# Altium PCB PCB1.PcbDoc
Units mm, origin at the board's own origin, x right, y up, seen from the top; angles counter-clockwise.
Board outline 42.04 x 44.96 mm, 2 copper layers (Top Layer, Bottom Layer); 11 components, 36 nets, 93 pads, 0 vias.
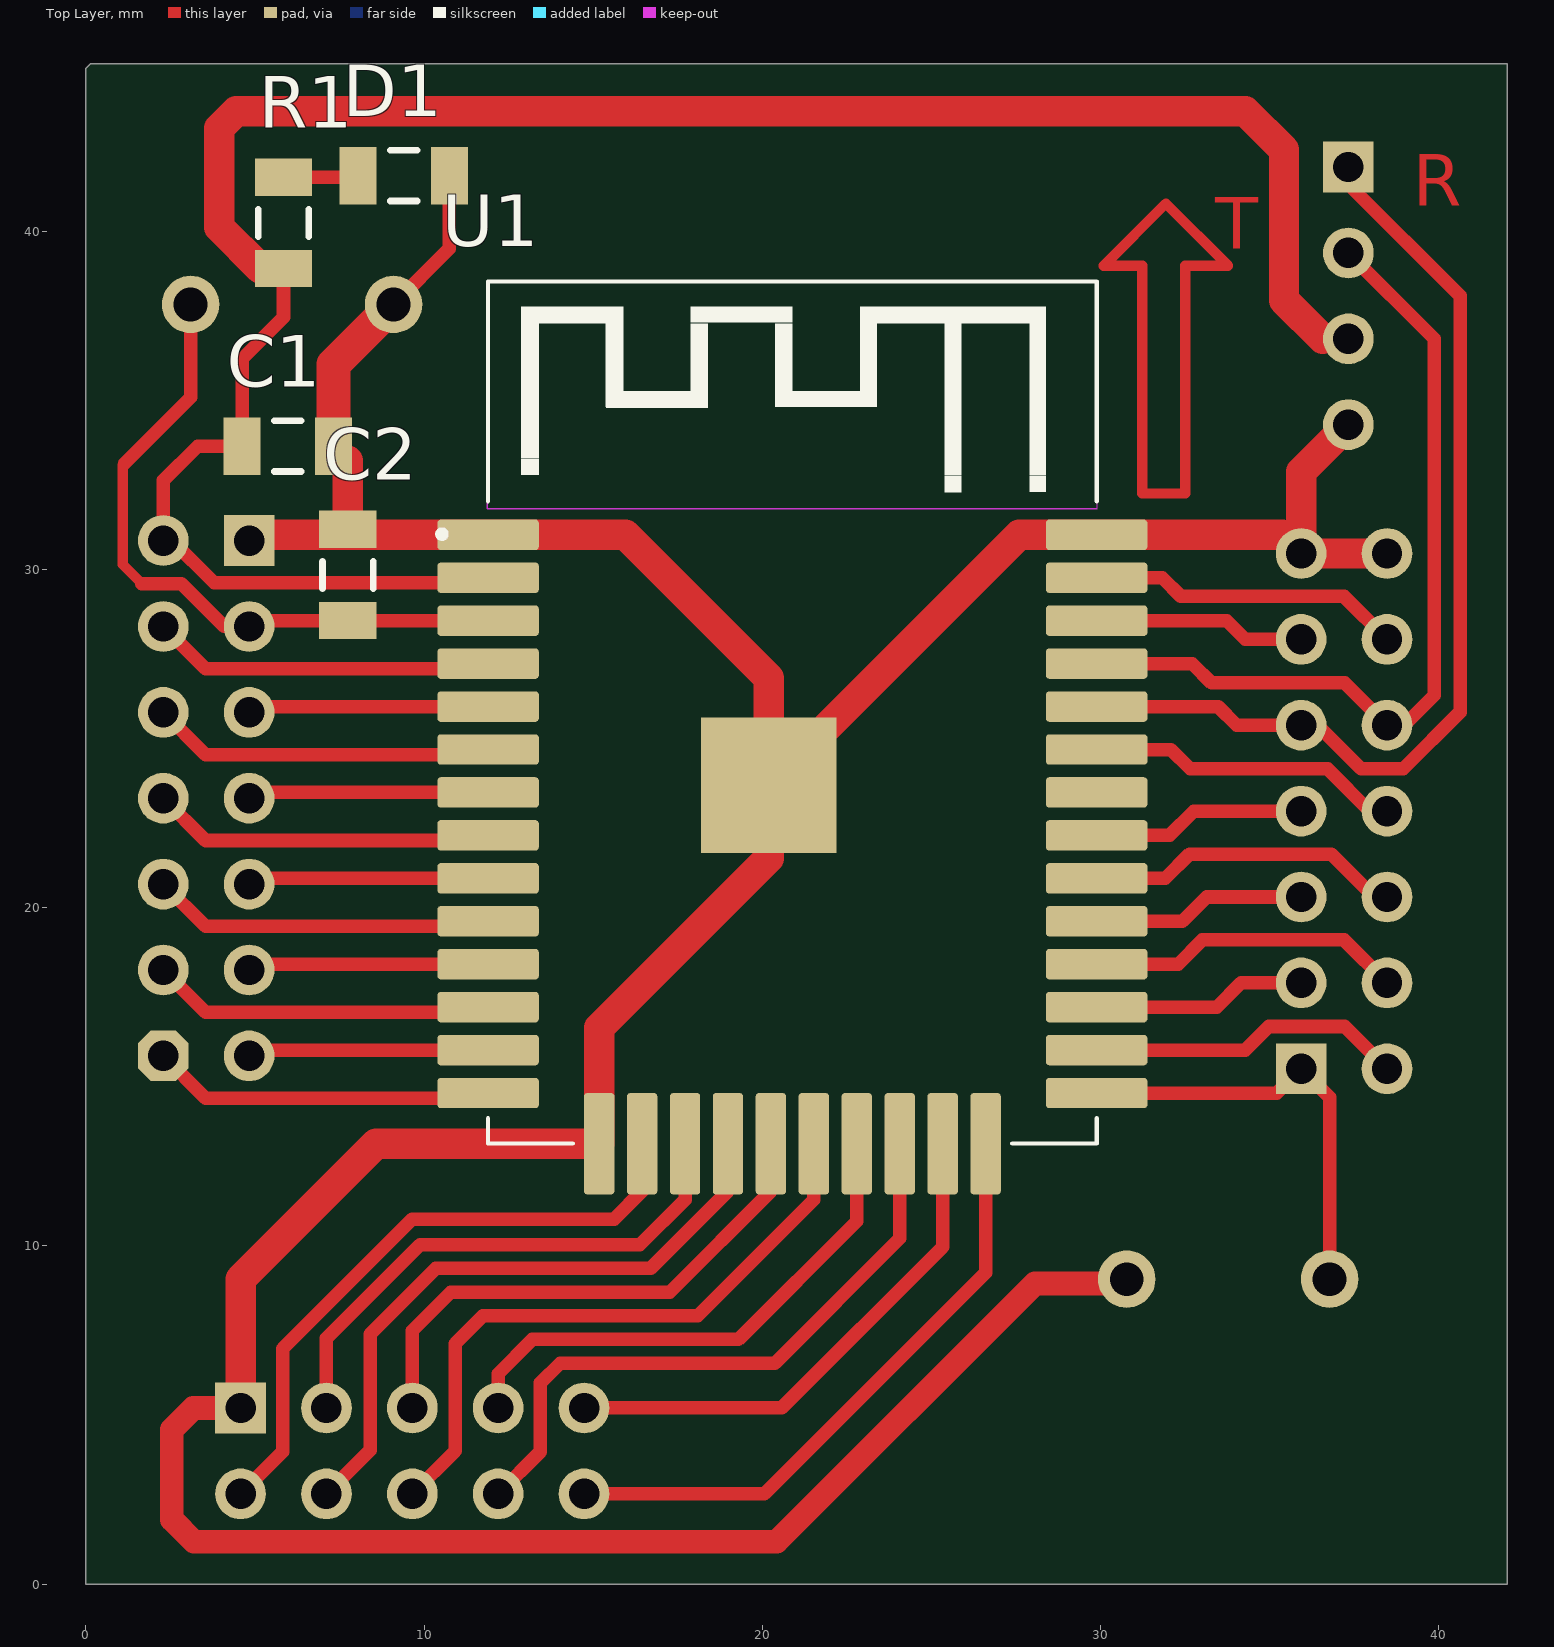
[diagram p0: Top Layer view]
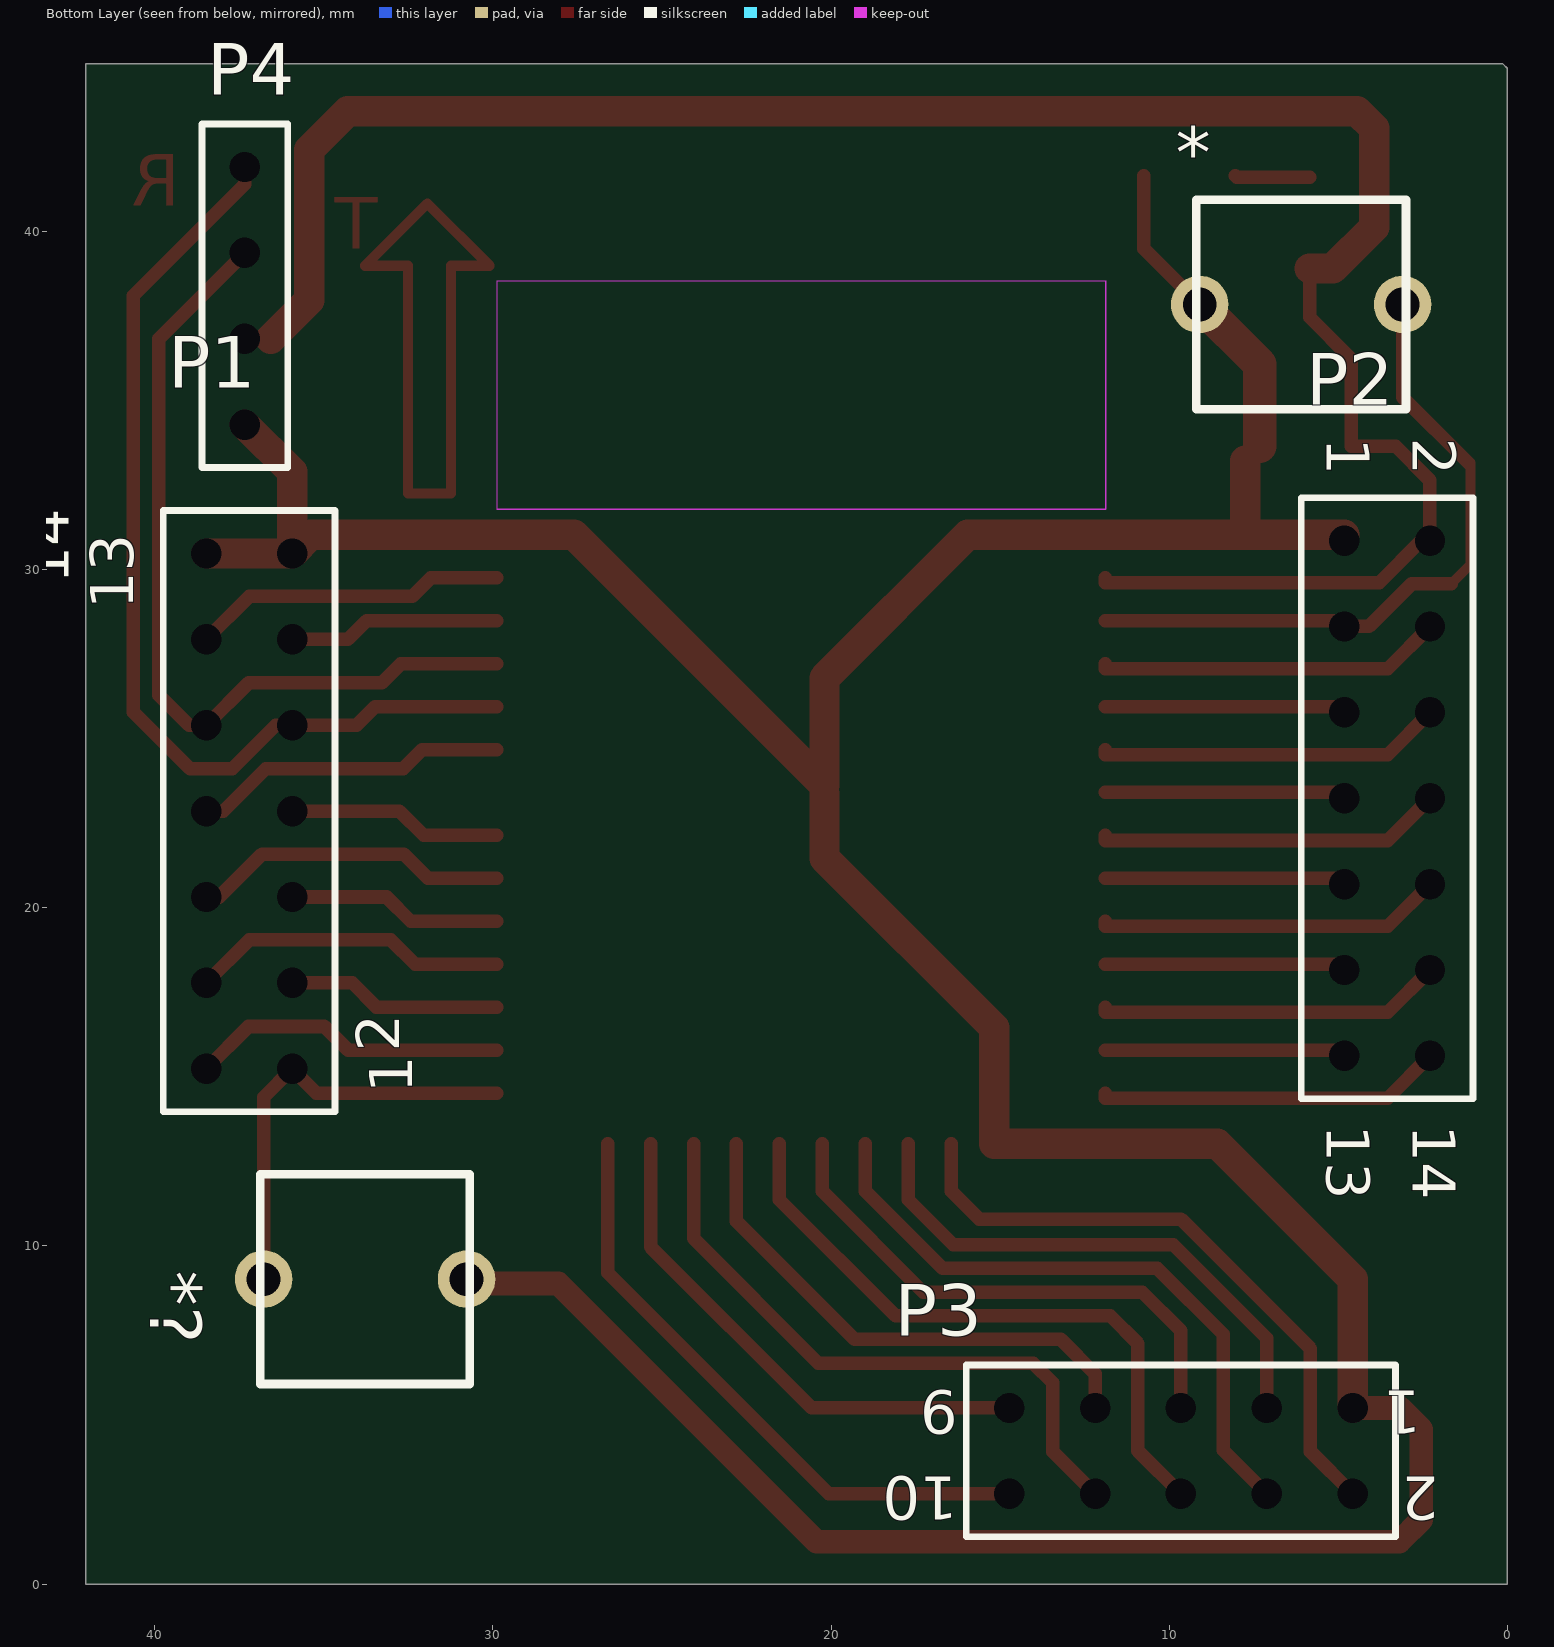
[diagram p1: Bottom Layer view, seen from below]

## Layer stack, top to bottom
Top Solder: solder mask 0.0102, Solder Resist, Dk 3.5
Top Layer: signal copper 0.0356
Dielectric 1: dielectric 0.32, FR-4, Dk 4.8
Bottom Layer: signal copper 0.0356
Bottom Solder: solder mask 0.0102, Solder Resist, Dk 3.5

## Board outline
0,0 42.037,0 42.037,44.958 0.127,44.958 0,44.831

## Design rules (kind name [scope] priority, off if disabled: settings)
Clearance [All] p1: gap=0.3 ignorepadtopadclearanceinfootprint=FALSE
PolygonConnect [All] p1: connectstyle=Relief reliefconductorwidth=0.254 reliefentries=4 polygonreliefangle="90 Angle" airgapwidth=0.254
RoutingVias [All] p1: holewidth=0.711 width=1.27 viastyle="Through Hole" minholewidth=0.711 minwidth=1.27 maxholewidth=0.711 maxwidth=1.27
SolderMaskExpansion [All] p1: expansion=0.102
Width [All] p1: maxlimit=2 minlimit=0.3 preferedwidth=0.4
30 further rules are at their usual default settings.

## Components (designator, comment, footprint, x,y, rotation, side; value= is the part's Value field where it differs from the comment)
* "Tactile Switch" "TACTILE SWITCH 2 PIN(6*6*..)" 6.096,37.846 r0 bottom
*? "Tactile Switch" "TACTILE SWITCH 2 PIN(6*6*..)" 33.782,9.017 r180 bottom
C1 "Cap" C1206 5.969,33.655 r0 top value=2200uF
C2 "Cap" C1206 7.747,29.845 r90 top value=10uF
D1 "LED0" C1206 9.398,41.656 r0 top
P1 "Header 7X2" HDR2X7#1 35.941,15.24 r90 bottom
P2 "Header 7X2" HDR2X7#2 4.826,30.861 r270 bottom
P3 "Header 5X2" HDR2X5 4.572,5.207 r0 bottom
P4 "Header 4" HDR1X4 37.338,41.91 r270 bottom
R1 "Res1" C1206 5.842,40.259 r90 top value=1K
U1 "ESP-WROOM-32" MODULE_ESP-WROOM-32 20.893,22.777 r0 top

## Footprints (in the part's own frame and the unit in brackets; to place one, negate y for a bottom-side part, rotate by r counter-clockwise, add the part's x,y. Pads: shape width x height; smd on the part's side, far side on the other; paste and mask are expansions set on the pad)
C1206 [mm] "Chip Capacitor, Body 3.2x1.6mm, IPC High Density"
  rect 1.1x1.7 smd: 1(-1.35,0) 2(1.35,0)
  silkscreen extent -0.4,-0.75 0.4,0.75, body extent -1.7,-0.9 1.7,0.9, height 1.3
HDR1X4 [mm] "Connector; Header; 4 Position"
  rect 0x0 / inner rect 1.5x1.5 / far side rect 1.5x1.5 hole 0.9: 1(0,0)
  round 0 / inner round 1.5 / far side round 1.5 hole 0.9: 2(2.54,0) 3(5.08,0) 4(7.62,0)
  silkscreen extent -1.27,-1.27 8.89,1.27
HDR2X5 [mm] "Connector; Header; 5x2 Position"
  rect 0x0 / inner rect 1.5x1.5 / far side rect 1.5x1.5 hole 0.9: 1(0,0)
  round 0 / inner round 1.5 / far side round 1.5 hole 0.9: 2(0,2.54) 3(2.54,0) 4(2.54,2.54) 5(5.08,0) 6(5.08,2.54) 7(7.62,0) 8(7.62,2.54) 9(10.16,0) 10(10.16,2.54)
  silkscreen extent -1.27,-1.27 11.43,3.81
HDR2X7#1 [mm] "Connector; Header; 7x2 Position"
  rect 0x0 / inner rect 1.5x1.5 / far side rect 1.5x1.5 hole 0.9: 1(0,0)
  round 0 / inner round 1.5 / far side round 1.5 hole 0.9: 2(0,2.54) 3(2.54,0) 4(2.54,2.54) 5(5.08,0) 6(5.08,2.54) 7(7.62,0) 8(7.62,2.54) 9(10.16,0) 10(10.16,2.54) 11(12.7,0) 12(12.7,2.54) 13(15.24,0) 14(15.24,2.54)
  silkscreen extent -1.27,-1.27 16.51,3.81
HDR2X7#2 [mm] "Connector; Header; 7x2 Position"
  rect 0x0 / inner rect 1.5x1.5 / far side rect 1.5x1.5 hole 0.9: 1(0,0)
  round 0 / inner round 1.5 / far side round 1.5 hole 0.9: 2(0,2.54) 3(2.54,0) 4(2.54,2.54) 5(5.08,0) 6(5.08,2.54) 7(7.62,0) 8(7.62,2.54) 9(10.16,0) 10(10.16,2.54) 11(12.7,0) 12(12.7,2.54) 13(15.24,0)
  oct 0x0 / inner oct 1.5x1.5 / far side oct 1.5x1.5 hole 0.9: 14(15.24,2.54)
  silkscreen extent -1.27,-1.27 16.51,3.81
MODULE_ESP-WROOM-32 [mm]
  rrect22% 3x0.9 smd: 1(-9,8.255) 2(-9,6.985) 3(-9,5.715) 4(-9,4.445) 5(-9,3.175) 6(-9,1.905) 7(-9,0.635) 8(-9,-0.635) 9(-9,-1.905) 10(-9,-3.175) 11(-9,-4.445) 12(-9,-5.715) 13(-9,-6.985) 14(-9,-8.255) 25(9,-8.255) 26(9,-6.985) 27(9,-5.715) 28(9,-4.445) 29(9,-3.175) 30(9,-1.905) 31(9,-0.635) 32(9,0.635) 33(9,1.905) 34(9,3.175) 35(9,4.445) 36(9,5.715) 37(9,6.985) 38(9,8.255)
  rect 4x4 smd: 1.1(-0.7,0.845)
  rrect22% 0.9x3 smd: 15(-5.715,-9.755) 16(-4.445,-9.755) 17(-3.175,-9.755) 18(-1.905,-9.755) 19(-0.635,-9.755) 20(0.635,-9.755) 21(1.905,-9.755) 22(3.175,-9.755) 23(4.445,-9.755) 24(5.715,-9.755)
  Keep-Out Layer region: 9,9.026 -9.026,9.026 -9.026,15.75 9,15.75
  Keep-Out Layer region: 9,9.012 -9.012,9.012 -9.012,15.75 9,15.75
  silkscreen extent -10.46,-9.75 9,15.75, body extent -9,-12.75 9,12.75, height 3.25
"TACTILE SWITCH 2 PIN(6*6*..)" [mm]
  round 1.7 hole 1: 1(-3,0) 2(3,0)
  silkscreen extent -3.1,-3.1 3.1,3.1

## Part data
C1 C2: "Capacitor", LatestRevisionDate=17-Jul-2002, LatestRevisionNote="Re-released for DXP Platform.", PackageDescription="Radial Cap, Thru-Hole; 2 Leads; 0.3 in Pin Spacing", PackageReference=RAD-0.3, Published=8-Jun-2000, Publisher="Altium Limited"
D1: "Typical INFRARED GaAs LED", LatestRevisionDate=08-Jul-2005, LatestRevisionNote="Mech Layer 1 removed.", PackageDescription="LED; 2 Leads", PackageReference=LED-0, Published=8-Jun-2000, Publisher="Altium Limited"
P1 P2: "Header, 7-Pin, Dual row", LatestRevisionDate=17-Jul-2002, LatestRevisionNote="Re-released for DXP Platform.", Publisher="Altium Limited"
P3: "Header, 5-Pin, Dual row", LatestRevisionDate=17-Jul-2002, LatestRevisionNote="Re-released for DXP Platform.", Publisher="Altium Limited"
P4: "Header, 4-Pin", LatestRevisionDate=17-Jul-2002, LatestRevisionNote="Re-released for DXP Platform.", Publisher="Altium Limited"
R1: "Resistor", LatestRevisionDate=17-Jul-2002, LatestRevisionNote="Re-released for DXP Platform.", PackageDescription="Axial Device, Thru-Hole; 2 Leads; 0.3 in Pin Spacing", PackageReference=AXIAL-0.3, Published=8-Jun-2000, Publisher="Altium Limited"
U1: "Transceptor serie ESP-WROOM-32; Placa de evaluación 802.11 b/g/n (Wi-Fi, WiFi, WLAN), Bluetooth® Smart 4.x de bajo consumo (BLE)", Package="Module Espressif Systems", Check_prices=https://www.snapeda.com/parts/ESP-WROOM-32/Espressif+Systems/view-part/?ref=eda, MF="Espressif Systems", MP=ESP-WROOM-32, SnapEDA_Link=https://www.snapeda.com/parts/ESP-WROOM-32/Espressif+Systems/view-part/?ref=snap

## Nets (pads, with @x,y where several pads share a name; then routed paths per layer and width w, separated by ;. In a path a pad name is that pad's centre, name@x,y a point inside that pad or via, vN(x,y) a via of type N, cw(c..) or ccw(c..) an arc to the next point about the centre after c; other vN are vias at no path point)
3V3: C1.1 P2.2 P4.3 R1.1 U1.2 | length 64.9
  Top Layer w0.4: R1.1 5.842,37.465 4.619,36.242 C1.1 3.302,33.655 2.286,32.639 P2.2 2.54,30.861 3.79,29.611 11.893,29.611 U1.2 ; 36.576,36.83 P4.3
  Top Layer w0.9: R1.1 5.16,38.909 3.937,40.132 3.937,43.053 4.445,43.561 34.29,43.561 35.433,42.418 35.433,37.973 36.576,36.83
EN: *.1 C2.1 P2.3 U1.3 | length 20.2
  Top Layer w0.3: 1.143,33.147 1.086,33.09 1.086,30.156 1.651,29.591
  Top Layer w0.4: 1.143,33.147 3.096,35.1 *.1 ; 1.651,29.591 2.82,29.591 4.09,28.321 P2.3 5,28.495 C2.1 7.75,28.492 U1.3
GND: *.2 *?.2 C1.2 C2.2 D1.2 P1.13 P1.14 P2.1 P3.1 P4.4 U1.1 U1.1.1 U1.15 U1.38 | length 123.6
  Top Layer w0.4: C1.2 C1.2@7.747,33.227 ; *.2 10.748,39.498 D1.2
  Top Layer w0.7: P3.1 3.175,5.207 2.54,4.572 2.54,1.905 3.195,1.25 20.427,1.25 28.067,8.89 30.528,8.89 *?.2@30.782,9.144
  Top Layer w0.9: P3.1 4.572,9.017 8.577,13.022 U1.15 15.178,16.448 20.193,21.463 U1.1.1@20.193,23.368 ; P2.1@4.826,31.032 U1.1 15.958,31.032 20.193,26.797 U1.1.1 27.603,31.032 U1.38 35.389,31.032 P1.13 ; C2.2 C1.2@7.747,33.227 ; P4.4 35.941,32.893 P1.13 ; P1.14 P1.13
  Top Layer w1: C1.2 7.319,36.069 *.2
IO0: *?.1 P1.1 U1.25 | length 12.9
  Top Layer w0.4: U1.25 35.223,14.522 P1.1 36.782,14.399 *?.1
IO2: P3.10 U1.24 | length 18.4
  Top Layer w0.4: P3.10 20.066,2.667 26.608,9.209 U1.24
IO4: P1.2 U1.26 | length 9.4
  Top Layer w0.4: U1.26 34.286,15.792 34.984,16.49 37.231,16.49 P1.2
IO5: P1.5 U1.29 | length 6.3
  Top Layer w0.4: U1.29 32.429,19.602 33.147,20.32 P1.5
IO12: P2.14 U1.14 | length 10.3
  Top Layer w0.4: P2.14 3.536,14.371 11.893,14.371 U1.14
IO13: P3.2 U1.16 | length 18.8
  Top Layer w0.4: P3.2 5.822,3.917 5.822,6.965 9.652,10.795 15.621,10.795 16.448,11.622 U1.16
IO14: P2.13 U1.13 | length 7.1
  Top Layer w0.4: P2.13 4.997,15.792 U1.13
IO15: P3.9 U1.23 | length 15.6
  Top Layer w0.4: P3.9 20.574,5.207 25.338,9.971 U1.23
IO16: P1.3 U1.27 | length 6.3
  Top Layer w0.4: U1.27 33.445,17.062 34.163,17.78 P1.3
IO17: P1.4 U1.28 | length 9.4
  Top Layer w0.4: U1.28 32.302,18.332 33.02,19.05 37.211,19.05 P1.4
IO18: P1.6 U1.30 | length 9.4
  Top Layer w0.4: U1.30 31.921,20.872 32.639,21.59 36.83,21.59 38.1,20.32 P1.6
IO19: P1.7 U1.31 | length 6.3
  Top Layer w0.4: U1.31 32.048,22.142 32.766,22.86 P1.7
IO21: P1.8 U1.33 | length 9.3
  Top Layer w0.4: U1.33 32.087,24.682 32.659,24.11 36.723,24.11 37.973,22.86 P1.8
IO22: P1.11 U1.36 | length 6.3
  Top Layer w0.4: U1.36 33.738,28.492 34.29,27.94 P1.11
IO23: P1.12 U1.37 | length 9.3
  Top Layer w0.4: U1.37 31.833,29.762 32.385,29.21 37.211,29.21 P1.12
IO25: P2.10 U1.10 | length 10.3
  Top Layer w0.4: P2.10 3.536,19.451 11.893,19.451 U1.10
IO26: P2.11 U1.11 | length 7.1
  Top Layer w0.4: P2.11 4.997,18.332 U1.11
IO27: P2.12 U1.12 | length 10.3
  Top Layer w0.4: P2.12 3.536,16.911 11.893,16.911 U1.12
IO32: P2.8 U1.8 | length 10.3
  Top Layer w0.4: P2.8 3.536,21.991 11.893,21.991 U1.8
IO33: P2.9 U1.9 | length 7.1
  Top Layer w0.4: P2.9 4.997,20.872 U1.9
IO34: P2.6 U1.6 | length 10.3
  Top Layer w0.4: P2.6 3.536,24.531 11.893,24.531 U1.6
IO35: P2.7 U1.7 | length 7.1
  Top Layer w0.4: P2.7 4.997,23.412 U1.7
NetD1_1: D1.1 R1.2 | length 2.2
  Top Layer w0.4: R1.2 8.001,41.609 D1.1
RX: P1.9 P4.1 U1.34 | length 29.7
  Top Layer w0.4: U1.34 33.484,25.952 34.036,25.4 P1.9 36.423,25.4 37.713,24.11 38.959,24.11 40.64,25.791 40.64,38.1 37.338,41.402 P4.1
SCK: P3.6 U1.20 | length 19
  Top Layer w0.4: P3.6 10.922,3.937 10.922,7.112 11.743,7.933 18.093,7.933 21.528,11.368 U1.20
SCS: P3.5 U1.19 | length 16
  Top Layer w0.4: P3.5 9.652,7.493 10.792,8.633 17.269,8.633 20.258,11.622 U1.19
SD0: P3.7 U1.21 | length 15.8
  Top Layer w0.4: P3.7 12.192,6.223 13.202,7.233 19.298,7.233 22.798,10.733 U1.21
SD1: P3.8 U1.22 | length 19
  Top Layer w0.4: P3.8 13.442,3.917 13.442,5.949 14.026,6.533 20.376,6.533 24.068,10.225 U1.22
SD2: P3.3 U1.17 | length 16
  Top Layer w0.4: P3.3 7.112,7.265 9.88,10.033 16.383,10.033 17.718,11.368 U1.17
SD3: P3.4 U1.18 | length 19
  Top Layer w0.4: P3.4 8.402,3.957 8.402,7.386 10.349,9.333 16.699,9.333 18.988,11.622 U1.18
SVN: P2.5 U1.5 | length 7.1
  Top Layer w0.4: P2.5 4.997,25.952 U1.5
SVP: P2.4 U1.4 | length 10.3
  Top Layer w0.4: P2.4 3.536,27.071 11.893,27.071 U1.4
TX: P1.10 P4.2 U1.35 | length 25.2
  Top Layer w0.4: U1.35 32.722,27.222 33.292,26.652 37.229,26.652 P1.10 38.989,25.4 39.878,26.289 39.878,36.83 P4.2
pads on no net: U1.32
copper on no net: | length 22.4
  Top Layer w0.3: 30.099,38.989 31.242,38.989 31.242,32.258 32.512,32.258 32.512,38.989 33.782,38.989 31.941,40.831 30.099,38.989

## Other copper
Top Layer:
  text "R" at 39.243,40.767 h1.52
  text "T" at 33.401,39.497 h1.52

## Silkscreen, mask and mechanical layers (free items; w line width, h text height)
Mechanical 13:
  the board outline again, w0.254

## Text inside footprints (layer, text, board x,y; h text height)
P1: Bottom Overlay "13" at 40.64,28.829 h1.27 r270; Bottom Overlay "14" at 42.545,29.591 h1.27 r270; Bottom Overlay "1" at 32.385,14.522 h1.27 r270; Bottom Overlay "2" at 32.766,15.748 h1.27 r270
P2: Bottom Overlay "13" at 5.334,13.589 h1.27 r90; Bottom Overlay "14" at 2.794,13.589 h1.27 r90; Bottom Overlay "1" at 5.334,33.909 h1.27 r90; Bottom Overlay "2" at 2.794,33.909 h1.27 r90
P3: Bottom Overlay "2" at 2.032,3.175 h1.27 r180; Bottom Overlay "1" at 2.54,5.715 h1.27 r180; Bottom Overlay "9" at 16.256,5.715 h1.27 r180; Bottom Overlay "10" at 16.256,3.175 h1.27 r180